# Altium PCB PCB1.PcbDoc (part 1 of 2)
Units mm, origin at the board's own origin, x right, y up, seen from the top; angles counter-clockwise.
Board outline 50.75 x 57.45 mm, 4 copper layers (Top Layer, GND, PWR, Bottom Layer), stack 1.591 mm thick; 64 components, 47 nets, 256 pads, 141 vias.
Unrouted connection lines stored in the file: 59.
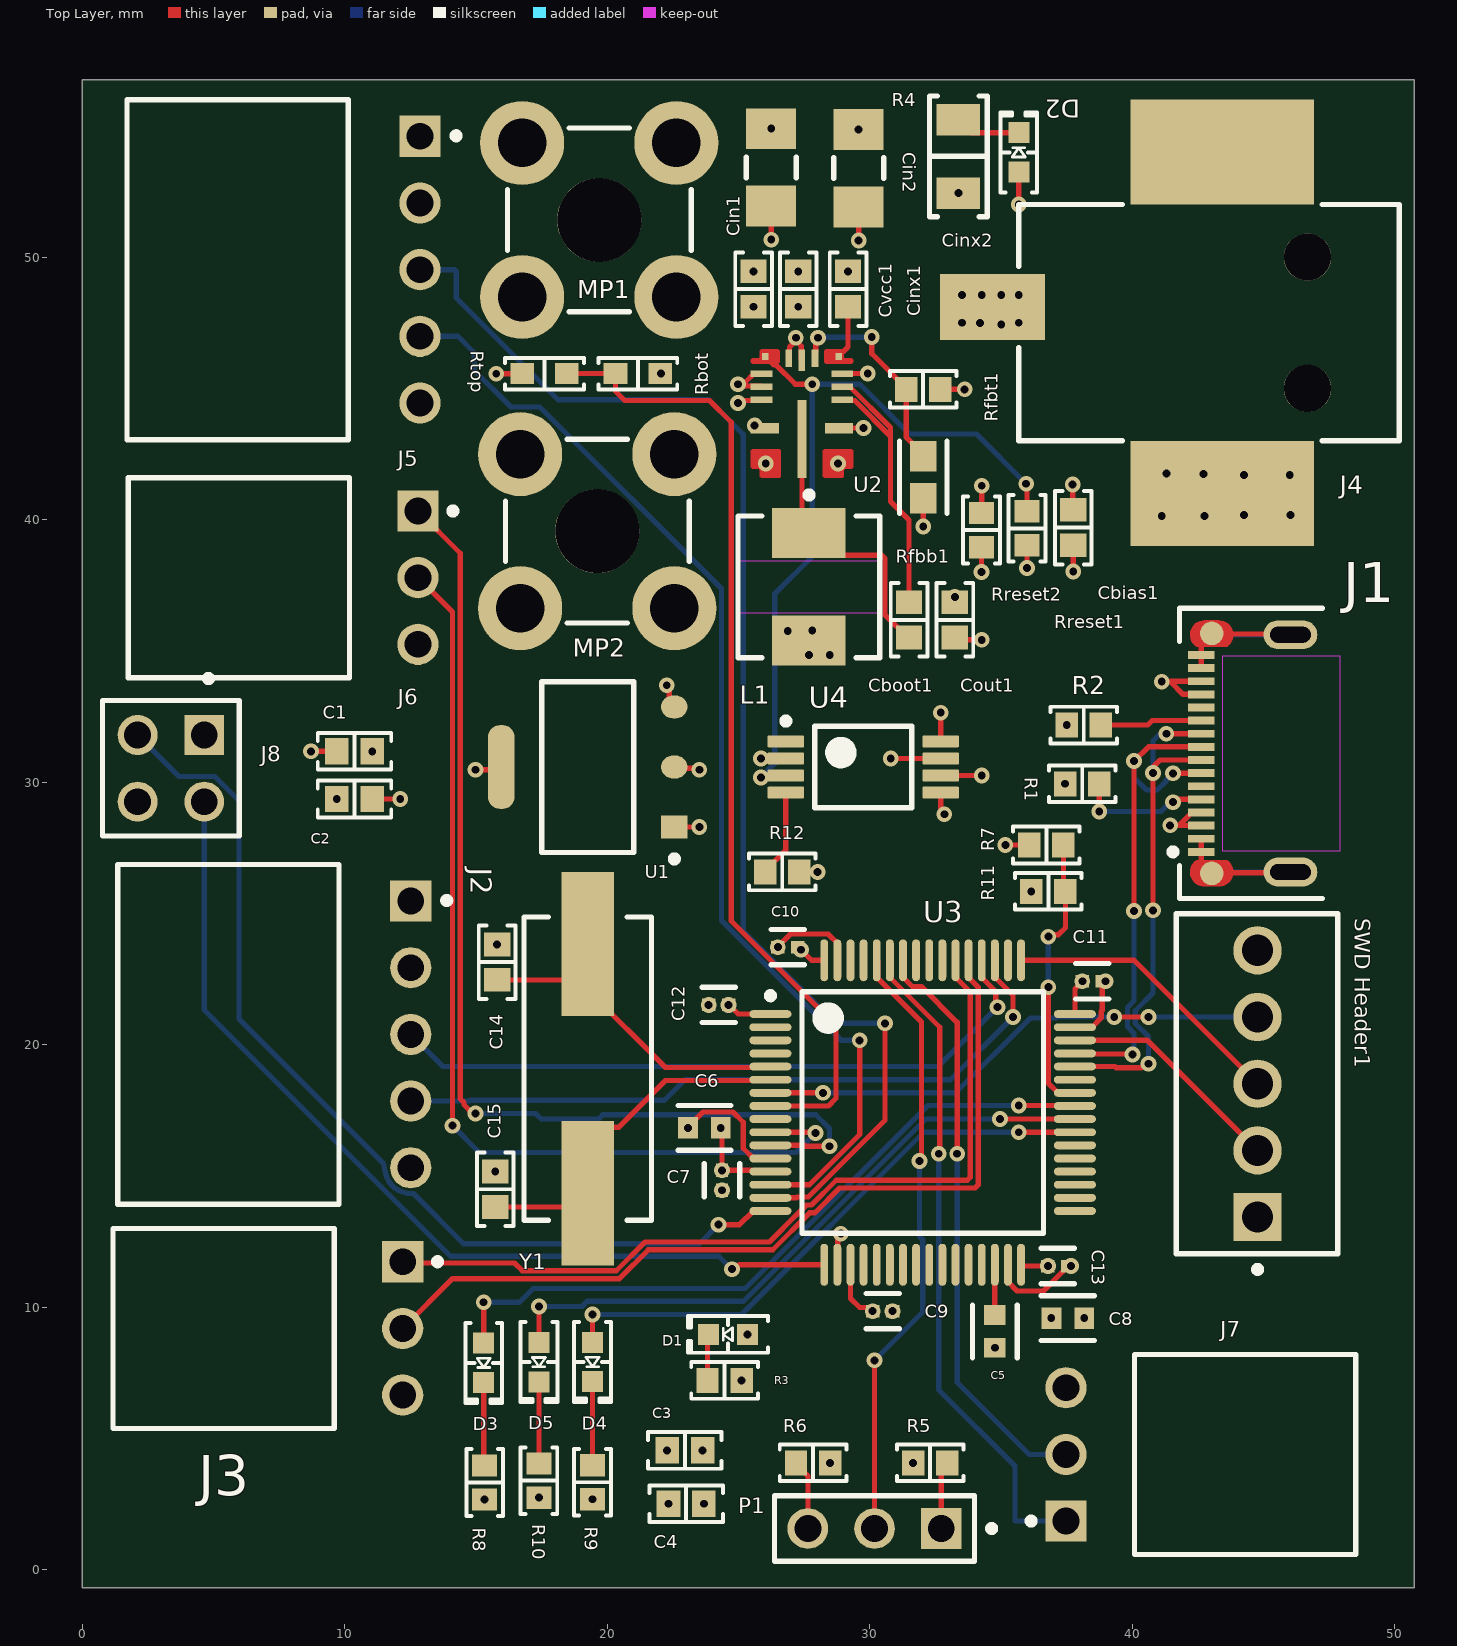
[diagram p0: Top Layer view]
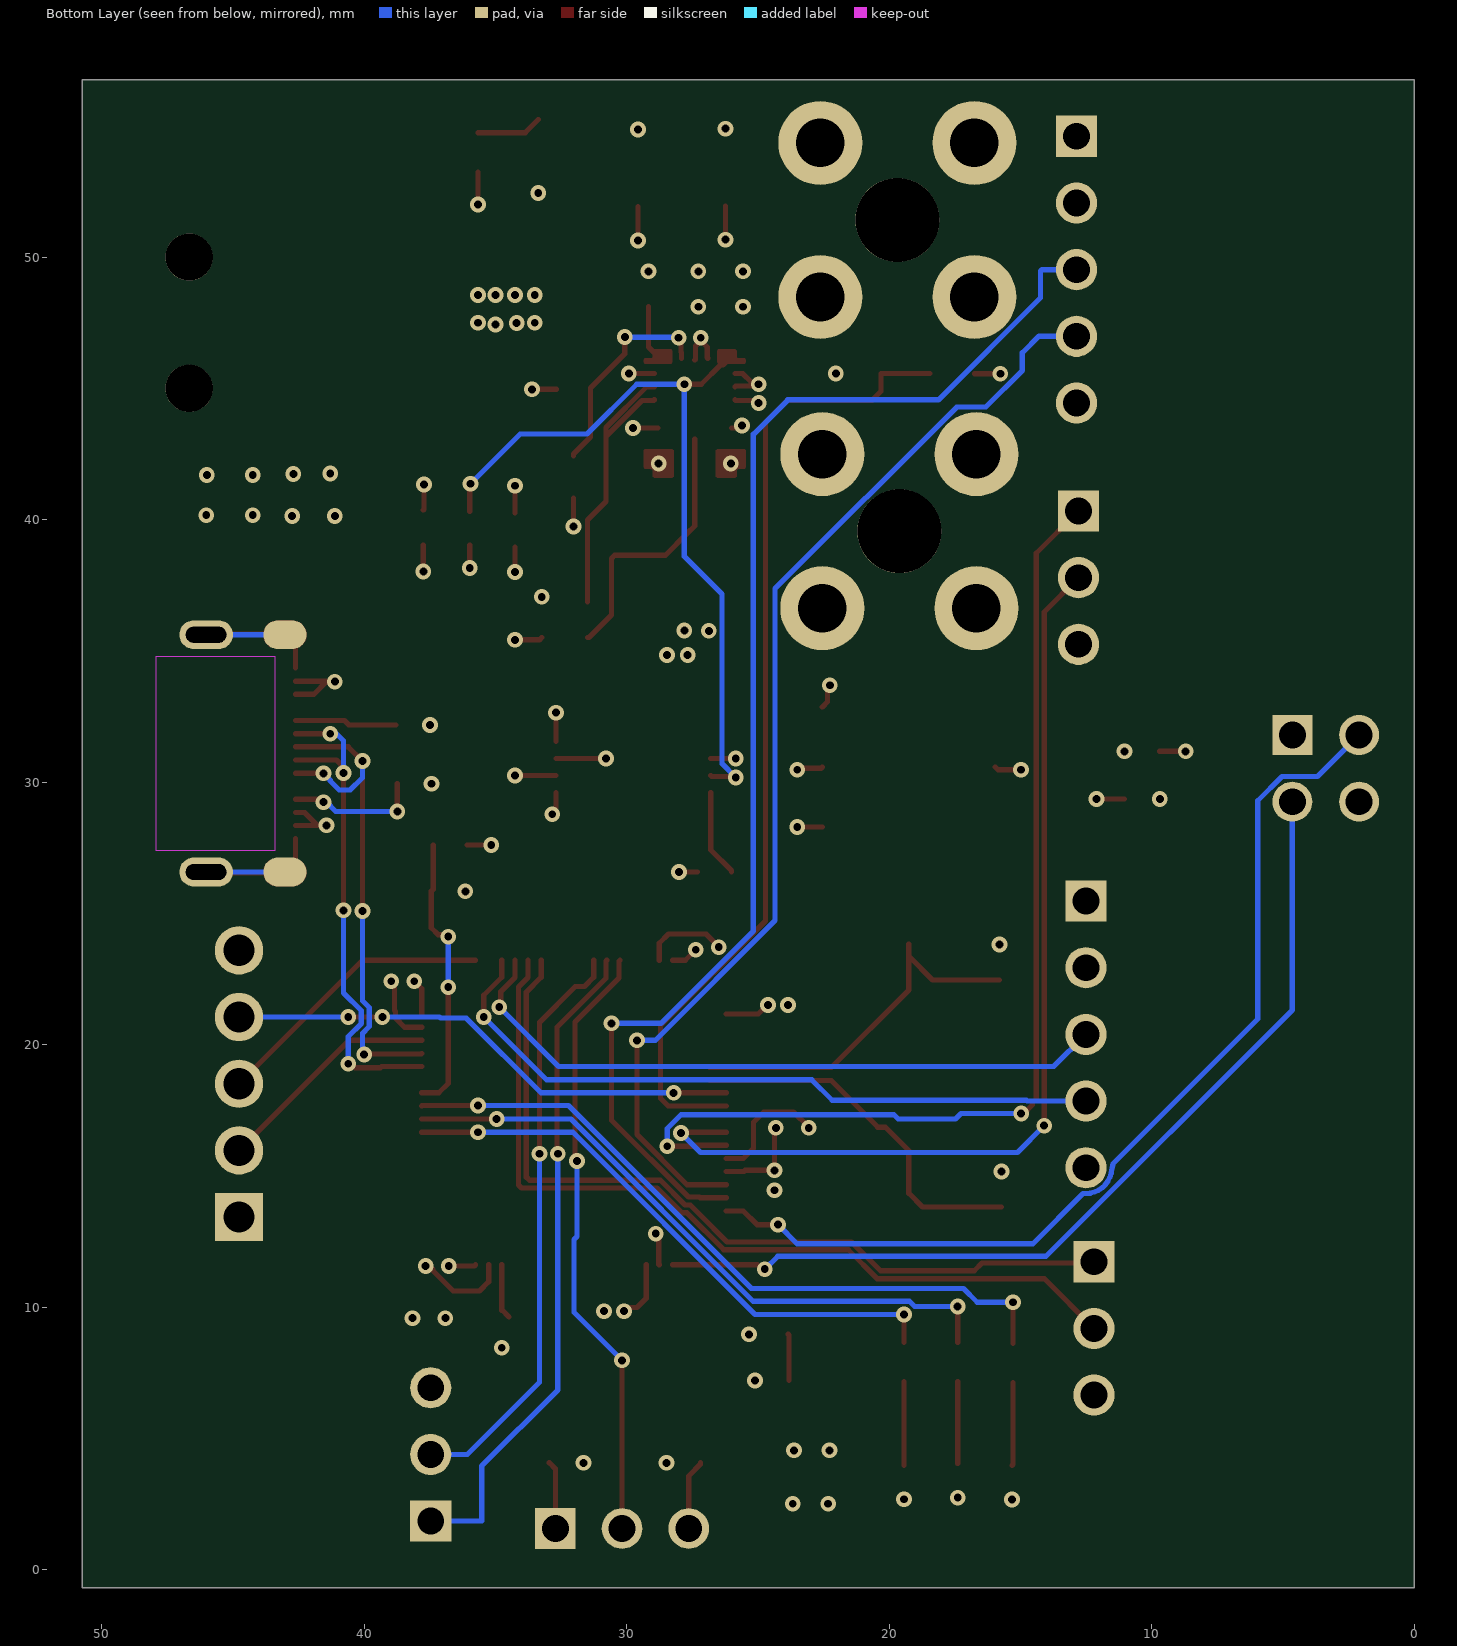
[diagram p1: Bottom Layer view, seen from below]
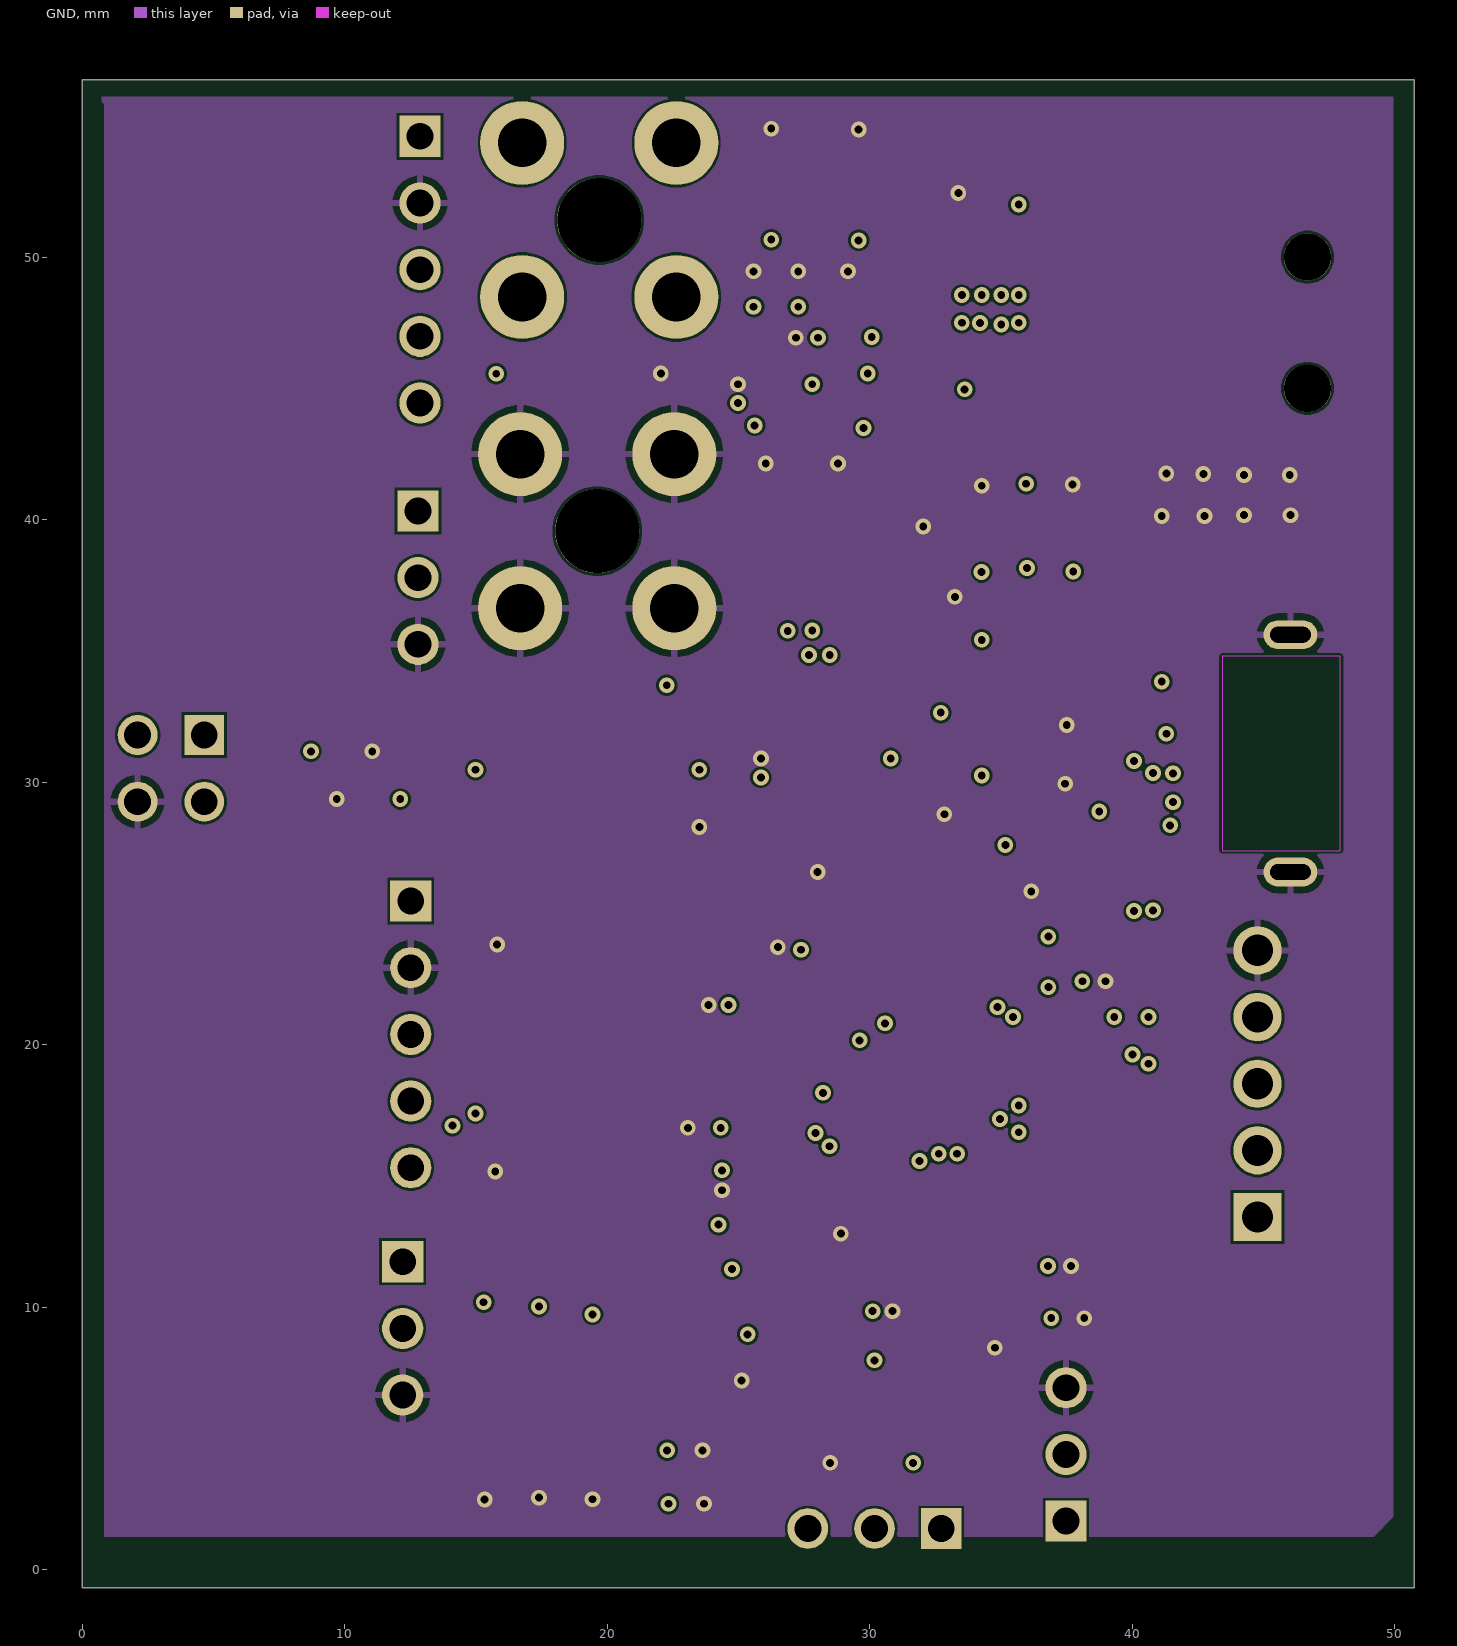
[diagram p2: GND]
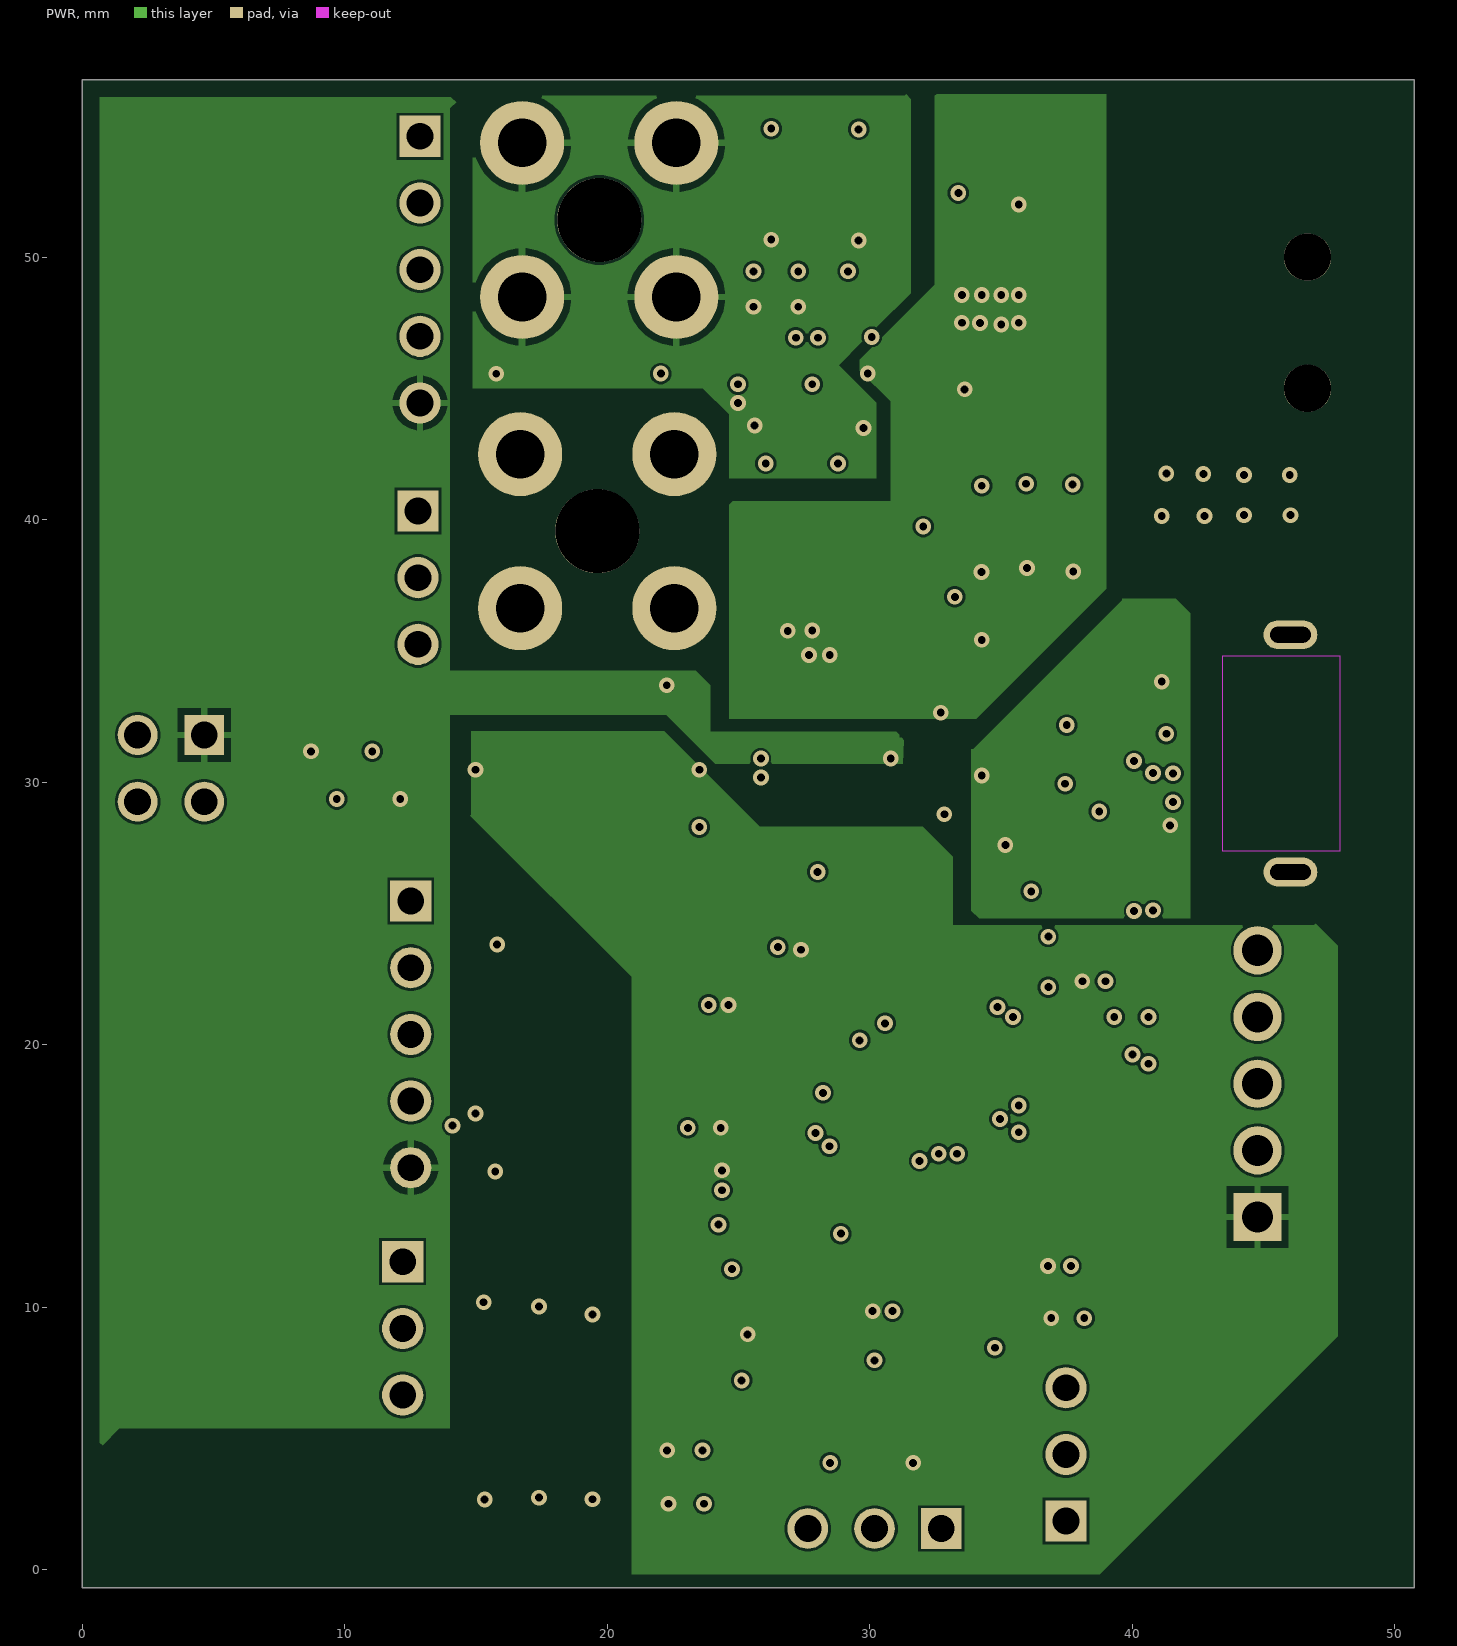
[diagram p3: PWR]
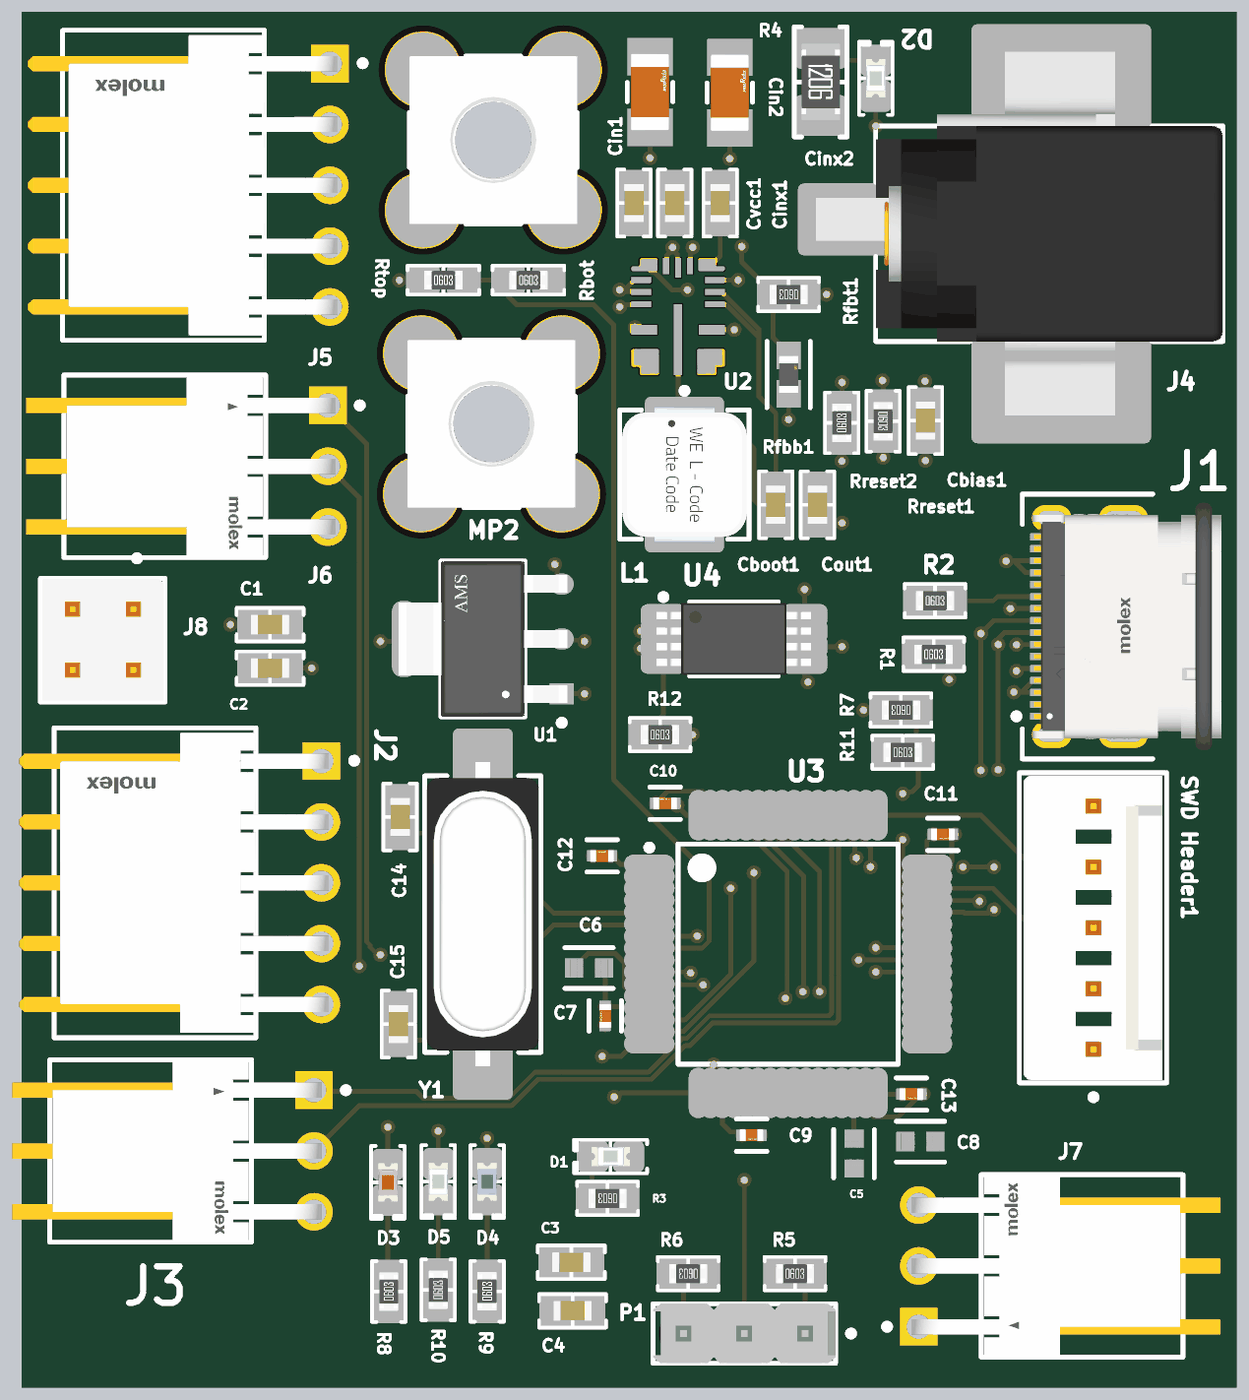
[diagram p4: 3D render of the assembled board from above, using the file's embedded part models]

## Layer stack, top to bottom
Top Solder: solder mask 0.0127, Solder Resist, Dk 3.3
Top Layer: signal copper 0.035
Dielectric 1: prepreg 0.2104, PP-006, Dk 4.1
GND: signal copper 0.0175
Dielectric1: core 1.065, FR-4, Dk 4.3
PWR: signal copper 0.0175
Dielectric 2: prepreg 0.2104, PP-006, Dk 4.1
Bottom Layer: signal copper 0.035
Bottom Solder: solder mask 0.0127, Solder Resist, Dk 3.3

## Board outline
0,-0.686 50.749,-0.686 50.749,56.769 0,56.769

## Design rules (kind name [scope] priority, off if disabled: settings)
Clearance [All] p1: gap=0.1 ignorepadtopadclearanceinfootprint=TRUE
DiffPairsRouting [All] p1: maxlimit=0.254 minlimit=0.254 mostfreqgap=0.254 toplayer_minwidth=0.254 toplayer_maxwidth=0.254 toplayer_prefwidth=0.254 midlayer1_minwidth=0.254 midlayer1_maxwidth=0.254 midlayer1_prefwidth=0.254 midlayer2_minwidth=0.254 midlayer2_maxwidth=0.254 midlayer2_prefwidth=0.254 bottomlayer_minwidth=0.254 bottomlayer_maxwidth=0.254 bottomlayer_prefwidth=0.254 maxuncoupledlength=12.7
HoleSize [All] p1: absolutevalues=TRUE maxlimit=7.62 minlimit=0.254 maxpercent=80.000 minpercent=20.000
MinimumAnnularRing [All] p1: minimumring=0.13
MinimumSolderMaskSliver [All] p1: minsoldermaskwidth=0.1
PasteMaskExpansion [All] p1: expansion=0.254
PlaneClearance [All] p1: clearance=0.381
PlaneConnect [All] p1: pad.planeconnectstyle=Relief pad.reliefexpansion=0.508 pad.reliefentries=4 pad.reliefconductorwidth=0.254 pad.reliefairgap=0.254 via.planeconnectstyle=Direct via.reliefexpansion=0.508 via.reliefentries=4 via.reliefconductorwidth=0.254 via.reliefairgap=0.254
PolygonConnect [All] p1: thpad.connectstyle=Relief thpad.reliefconductorwidth=0.254 thpad.reliefentries=4 thpad.polygonreliefangle="90 Angle" thpad.airgapwidth=0.254 smdpad.connectstyle=Relief smdpad.reliefconductorwidth=0.254 smdpad.reliefentries=4 smdpad.polygonreliefangle="90 Angle" smdpad.airgapwidth=0.254 via.connectstyle=Direct via.reliefconductorwidth=0.254 via.reliefentries=4 via.polygonreliefangle="90 Angle" via.airgapwidth=0.254
RoutingVias [All] p1: holewidth=0.15 width=0.25 viastyle="Through Hole" minholewidth=0.15 minwidth=0.25 maxholewidth=0.3 maxwidth=0.6
SMDNeckDown [All] p1: percent=100.000
SilkToSolderMaskClearance SilkscreenOverComponentPads [IsPad] p1: minsilkscreentomaskgap=0.1 clearancetoexposedcopper=TRUE
SolderMaskExpansion [All] p1: expansion=0.254 istentingtop=FALSE
SupplyNets "Schematic Supply Nets_2" [InNet('5V_SYS')] p1: voltage=0.000
SupplyNets "Schematic Supply Nets_3" [InNet('26V0')] p2: voltage=0.000
SupplyNets "Schematic Supply Nets_1" [InNet('3V3')] p3: voltage=0.000
SupplyNets "Schematic Supply Nets" [InNet('GND')] p4: voltage=0.000
Width [All] p1: maxlimit=0.5 minlimit=0.1 preferedwidth=0.2
23 further rules are at their usual default settings.

## Classes and differential pairs
component class TOP: J4 MP1 MP2
component class POWER: C1 C2 C3 C4 Cbias1 Cboot1 Cin1 Cin2 Cinx1 Cinx2 Cout1 Cvcc1 D1 D2 L1 R3 R4 R12 Rbot Rfbb1 Rfbt1 Rreset1 Rreset2 Rtop U1 U2 U4
component class USBC: J1 R1 R2
component class Designator: C5 C6 C7 C8 C9 C10 C11 C12 C13 C14 C15 D3 D4 D5 J2 J3 J5 J6 J7 J8 P1 R5 R6 R7 R8 R9 R10 R11 "SWD Header1" U3 Y1

## Components (designator, comment, footprint, x,y, rotation, side; value= is the part's Value field where it differs from the comment)
C1 "10 µF" "CAP 0603_1608" 10.371,31.179 r180 top
C2 "10 µF" "CAP 0603_1608" 10.371,29.362 r0 top
C3 "10 µF" "CAP 0603_1608" 22.957,4.549 r180 top
C4 "10 µF" "CAP 0603_1608" 23.008,2.517 r180 top
C5 "2u2" FP-CL10-IPC_C 34.766,9.085 r270 top
C6 "4u7" FP-CL10-IPC_C 23.699,16.835 r180 top
C7 "100n" FP-CL779-IPC_C 24.374,14.838 r270 top
C8 "4u7" FP-CL10-IPC_C 37.545,9.585 r0 top
C9 "100n" FP-CL779-IPC_C 30.49,9.853 r0 top
C10 "100n" FP-CL779-IPC_C 26.878,23.719 r180 top
C11 "100n" FP-CL779-IPC_C 38.479,22.419 r0 top
C12 "100n" FP-CL779-IPC_C 24.243,21.519 r180 top
C13 "100n" FP-CL779-IPC_C 37.166,11.569 r0 top
C14 "30 pF" "CAP 0603_1608" 15.805,23.146 r270 top
C15 "30 pF" "CAP 0603_1608" 15.733,14.496 r270 top
Cbias1 "0.1 µF" "CAP 0603_1608" 37.754,39.7 r90 top
Cboot1 "0.1 µF" "CAP 0603_1608" 31.5,36.189 r90 top
Cin1 "10uF" FP-GRT31C-0_2-IPC_A 26.246,53.424 r90 top
Cin2 "10uF" FP-GRT31C-0_2-IPC_A 29.578,53.397 r90 top
Cinx1 "1µF" "CAP 0603_1608" 25.576,48.788 r90 top
Cinx2 "1µF" "CAP 0603_1608" 27.279,48.788 r90 top
Cout1 "47 µF" "CAP 0603_1608" 33.243,36.189 r90 top
Cvcc1 "1µF" "CAP 0603_1608" 29.176,48.788 r90 top
D1 "Green" "LED 0603_1608 GREEN" 24.599,8.967 r180 top
D2 "Green" "LED 0603_1608 GREEN" 35.677,53.998 r90 top
D3 "Red" "LED 0603_1608 RED" 15.293,7.88 r270 top
D4 "Blue" "LED 0603_1608 BLUE" 19.441,7.914 r270 top
D5 "Green" "LED 0603_1608 GREEN" 17.399,7.911 r270 top
J1 "213083-0005" FP-2130830005-MFG 46.177,31.1 r90 top
J2 "22-12-2054" FP-22-12-2054-MFG 5.69,20.396 r90 top
J3 "22-12-2034" FP-22-12-2034-MFG 5.385,9.195 r90 top
J4 "694106105102" 694106105102 42.927,47.506 r90 top
J5 "22-12-2054" FP-22-12-2054-MFG 6.045,49.528 r90 top
J6 "22-12-2034" FP-22-12-2034-MFG 5.969,37.795 r90 top
J7 "22-12-2034" FP-22-12-2034-MFG 44.298,4.394 r270 top
J8 "HTSW-102-07-G-D" FP-HTSW-102-07-G-D-MFG 3.378,30.531 r180 top
L1 "744373340068" WE-LHMI_5020 27.686,37.446 r270 top
MP1 "74650073R" "WURTH 74650073" 19.696,51.421 r0 top
MP2 "74650073R" "WURTH 74650073" 19.62,39.565 r0 top
P1 "22-28-4033" MOLX-22-28-4033_V 30.184,1.571 r180 top
R1 "5.1 kOhms" "RES 0603_1608" 38.096,29.942 r0 top
R2 "5.1 kOhms" "RES 0603_1608" 38.154,32.177 r0 top
R3 "330 Ohms" "RES 0603_1608" 24.472,7.214 r180 top
R4 "500 Ohms" "RES 1206_3216" 33.375,53.848 r270 top
R5 "10 kOhms" "RES 0603_1608" 32.304,4.074 r0 top
R6 "10 kOhms" "RES 0603_1608" 27.841,4.074 r180 top
R7 "10 kOhms" "RES 0603_1608" 36.728,27.609 r180 top
R8 "330 Ohms" "RES 0603_1608" 15.33,3.324 r90 top
R9 "330 Ohms" "RES 0603_1608" 19.441,3.334 r90 top
R10 "330 Ohms" "RES 0603_1608" 17.397,3.396 r90 top
R11 "10 kOhms" "RES 0603_1608" 36.804,25.845 r0 top
R12 "750 Ohms" "RES 0603_1608" 26.667,26.586 r0 top
Rbot "33 kOhms" "YAGEO RES 0603_1608" 21.166,45.569 r0 top
Rfbb1 "24.9k" FP-TFCR0603-IPC_A 32.037,41.625 r270 top
Rfbt1 "100 kOhms" "RES 0603_1608" 32.037,44.969 r180 top
Rreset1 "100 kOhms" "RES 0603_1608" 35.989,39.675 r270 top
Rreset2 "100 kOhms" "RES 0603_1608" 34.26,39.609 r90 top
Rtop "300 kOhms" "YAGEO RES 0603_1608" 17.611,45.569 r0 top
"SWD Header1" "22-29-2051" FP-22-29-2051-MFG 44.755,18.517 r270 top
U1 "AMS1117-3.3" FP-AMS1117-IPC_C 19.26,30.582 r180 top
U2 "LM61480Q5RPHRQ1" RPH0016A 27.416,44.044 r180 top
U3 "STM32F446RCT6" STM-LQFP64_L 32.016,17.419 r0 top
U4 "TPS2115APWR" PW0008A_N 29.754,30.582 r0 top
Y1 "8MHz" "TXC 9C" 19.259,19.091 r270 top

## Footprints (in the part's own frame and the unit in brackets; to place one, negate y for a bottom-side part, rotate by r counter-clockwise, add the part's x,y. Pads: shape width x height; smd on the part's side, far side on the other; paste and mask are expansions set on the pad)
694106105102 [mm] "DC Power Jack Right Angled SMT ?6.4 with pegs"
  rect 2.5x4 smd: 1(0.6,8.25)
  rect 4x7 smd: 2(-6.5,-0.5) 3(6.5,-0.5)
  round 1.8 hole 1.8 unplated: MH1(-2.5,-3.75) MH2(2.5,-3.75)
  silkscreen extent -4.5,-7.25 4.5,7.25, body extent -7.6,-7.25 7.6,9.75, height 11.05
"CAP 0603_1608" [mm] "Chip Capacitor, 2-Leads, Body 1.60x0.80mm, IPC Medium Density"
  rect 0.9x1 smd: 1(-0.675,0) 2(0.675,0)
  silkscreen extent -1.4,-0.7 1.4,0.7, body extent -0.8,-0.41 0.8,0.41, height 0.82
FP-22-12-2034-MFG [mm]
  rect 1.57x1.57 hole 1.02 paste-2539.97 mask+0: 1(2.54,-6.823)
  round 1.57 hole 1.02 paste-2539.97 mask+0: 2(0,-6.823) 3(-2.54,-6.823)
  silkscreen extent -3.81,-8.27 3.81,4.22, body extent -3.91,-7.71 3.91,6.41, height 0.25
FP-22-12-2054-MFG [mm]
  rect 1.57x1.57 hole 1.02 paste-2539.97 mask+0: 1(5.08,-6.825)
  round 1.57 hole 1.02 paste-2539.97 mask+0: 2(2.54,-6.825) 3(0,-6.825) 4(-2.54,-6.825) 5(-5.08,-6.825)
  silkscreen extent -6.48,-8.32 6.48,4.34, body extent -6.58,-7.71 6.58,6.53, height 0.25
FP-22-29-2051-MFG [mm]
  rect 1.84x1.84 hole 1.19 paste-2539.97 mask+0: 1(5.08,0.02)
  round 1.84 hole 1.19 paste-2539.97 mask+0: 2(2.54,0.02) 3(0,0.02) 4(-2.54,0.02) 5(-5.08,0.02)
  silkscreen extent -6.48,-3.08 7.2,3.08, body extent -6.58,-3.18 6.58,3.18, height 0.25
FP-2130830005-MFG [mm]
  round 0.9 smd paste-1000 mask+0: 1(-4.57,3.15) 2(4.57,3.15)
  rrect100% 1.1x1.65 smd far side paste-1000 mask+0: 1(-4.52,3.15) 2(4.52,3.15)
  rrect100% 1.1x2.05 hole 1.55 slot 0.6 at 0 deg paste-2539.97 mask+0: 3(-4.52,0.15) 4(4.52,0.15)
  rect 0.3x1 smd paste+0 mask+0: A1(-3.75,3.55) A4(-2.75,3.55) A5(-1.75,3.55) A6(-0.75,3.55) A7(0.75,3.55) A8(1.75,3.55) A9(2.75,3.55) A12(3.75,3.55) B1(3.25,3.55) B4(2.25,3.55) B5(1.25,3.55) B6(0.25,3.55) B7(-0.25,3.55) B8(-1.25,3.55) B9(-2.25,3.55) B12(-3.25,3.55)
  Top Layer region: 5.07,3.425 5.001,3.691 4.812,3.891 4.549,3.974 4.28,3.919 4.07,3.741 4.07,3.741 4.07,2.559 4.28,2.381 4.549,2.326 4.812,2.409 5.001,2.609 5.07,2.875 5.07,2.875
  Top Layer region: -5.07,3.425 -5.001,3.691 -4.812,3.891 -4.549,3.974 -4.28,3.919 -4.07,3.741 -4.07,3.741 -4.07,2.559 -4.28,2.381 -4.549,2.326 -4.812,2.409 -5.001,2.609 -5.07,2.875 -5.07,2.875
  Keep-Out Layer region: -3.7,-1.745 3.7,-1.745 3.7,2.755 -3.7,2.755
  silkscreen extent -5.53,-1.07 5.53,4.75, body extent -5.33,-4.18 5.33,4.18, height 0.25
FP-AMS1117-IPC_C [mm]
  rect 1.004x0.872 smd paste+0 mask+0: 1(-3.295,2.29)
  rrect100% 1.004x0.872 smd paste+0 mask+0: 2(-3.295,0) 3(-3.295,-2.29)
  rrect87% 1.004x3.182 smd paste+0 mask+0: 4(3.295,0)
  silkscreen extent -3.42,-3.25 1.75,3.62, body extent -3.9,-3.35 3.9,3.35, height 0.25
FP-CL10-IPC_C [mm]
  rect 0.758x0.812 smd paste+0 mask+0: 1(-0.627,0) 2(0.627,0)
  silkscreen extent -1.01,-0.85 1.01,0.85, body extent -1.11,-0.55 1.11,0.55, height 0.25
FP-CL779-IPC_C [mm]
  rect 0.515x0.472 smd paste+0 mask+0: 1(-0.379,0) 2(0.379,0)
  silkscreen extent -0.64,-0.67 0.64,0.67, body extent -0.74,-0.38 0.74,0.38, height 0.25
FP-GRT31C-0_2-IPC_A [mm]
  rect 1.555x1.906 smd paste+0 mask+0: 1(-1.476,0) 2(1.476,0)
  silkscreen extent -0.4,-0.95 0.4,0.95, body extent -2.75,-1.45 2.75,1.45, height 0.25
FP-HTSW-102-07-G-D-MFG [mm]
  rect 1.52x1.52 hole 1.02 paste-2539.97 mask+0: 1(-1.27,-1.27)
  round 1.52 hole 1.02 paste-2539.97 mask+0: 2(-1.27,1.27) 3(1.27,-1.27) 4(1.27,1.27)
  silkscreen extent -2.6,-3.54 2.6,2.58, body extent -2.7,-2.68 2.7,2.68, height 0.25
FP-TFCR0603-IPC_A [mm]
  rect 1.158x1.012 smd paste+0 mask+0: 1(-0.802,0) 2(0.802,0)
  silkscreen extent -1.38,-0.91 1.38,0.91, body extent -1.88,-1.01 1.88,1.01, height 0.25
"LED 0603_1608 BLUE" [mm] "Chip Diode, 2-Leads, Body 1.60x0.80mm, IPC Medium Density"
  rect 0.8x0.8 smd: 1(-0.75,0) 2(0.75,0)
  silkscreen extent -1.52,-0.7 1.52,0.7, body extent -0.8,-0.4 0.8,0.4, height 0.53
"LED 0603_1608 GREEN" [mm] "Chip Diode, 2-Leads, Body 1.60x0.80mm, IPC Medium Density"
  rect 0.8x0.8 smd: 1(-0.75,0) 2(0.75,0)
  silkscreen extent -1.52,-0.7 1.52,0.7, body extent -0.8,-0.4 0.8,0.4, height 0.53
"LED 0603_1608 RED" [mm] "Chip Diode, 2-Leads, Body 1.60x0.80mm, IPC Medium Density"
  rect 0.8x0.8 smd: 1(-0.75,0) 2(0.75,0)
  silkscreen extent -1.52,-0.7 1.52,0.7, body extent -0.8,-0.4 0.8,0.4, height 0.53
MOLX-22-28-4033_V [mm] "THD, 3-Leads, Body 7.62x2.49mm, Pitch 2.54mm"
  rect 1.55x1.55 hole 1.02: 1(-2.54,0)
  round 1.55 hole 1.02: 2(0,0) 3(2.54,0)
  silkscreen extent -4.59,-1.24 3.81,1.24, body extent -3.81,-1.24 3.81,1.24, height 8.38
PW0008A_N [mm] "SOP, 8-Leads, Body 4.5x3.1mm, Pitch 0.65mm, IPC Medium Density"
  rrect22% 1.4x0.45 smd: 1(-2.95,0.975) 2(-2.95,0.325) 3(-2.95,-0.325) 4(-2.95,-0.975) 5(2.95,-0.975) 6(2.95,-0.325) 7(2.95,0.325) 8(2.95,0.975)
  silkscreen extent -3.07,-1.55 1.85,1.87, body extent -3.23,-1.5 3.23,1.5, height 1.2
"RES 0603_1608" [mm] "Chip Resistor, 2-Leads, Body 1.60x0.80mm, IPC Medium Density"
  rect 0.85x0.95 smd: 1(-0.65,0) 2(0.65,0)
  silkscreen extent -1.27,-0.7 1.27,0.7, body extent -0.8,-0.4 0.8,0.4, height 0.45
"RES 1206_3216" [mm] "Chip Resistor, 2-Leads, Body 3.13x1.55mm, IPC Medium Density"
  rect 1.2x1.65 smd: 1(-1.4,0) 2(1.4,0)
  silkscreen extent -2.3,-1.1 2.3,1.1, body extent -1.6,-0.8 1.6,0.8, height 0.6
RPH0016A [mm]
  rect 0.25x0.25 smd paste-0.112 mask+0.051: 1(-1.375,1.9) 6(-1.4,-2.175) 10(1.4,-2.175) 15(1.375,1.9)
  rect 1.075x0.4 smd paste+0 mask+0.051: 2(-1.413,0.55) 14(1.413,0.55)
  rect 0.825x0.25 smd paste+0 mask+0.051: 3(-1.538,-0.525) 4(-1.538,-1.025) 5(-1.538,-1.525) 11(1.538,-1.525) 12(1.538,-1.025) 13(1.538,-0.525)
  rect 0.25x0.675 smd paste+0 mask+0.051: 7(-0.5,-2.113) 9(0.5,-2.113)
  rect 0.25x0.825 smd paste+0 mask+0.051: 8(0,-2.038)
  rect 0.35x2.975 smd paste+0 mask+0.051: 16(0,0.963)
  Top Layer region: -1.9,1.35 -1.95,1.4 -1.95,2.05 -1.9,2.1 -1.65,2.1 -1.6,2.15 -1.6,2.4 -1.55,2.45 -0.85,2.45 -0.8,2.4 -0.8,1.4 -0.85,1.35
  Top Layer region: 1.9,1.35 1.95,1.4 1.95,2.05 1.9,2.1 1.65,2.1 1.6,2.15 1.6,2.4 1.55,2.45 0.85,2.45 0.8,2.4 0.8,1.4 0.85,1.35
  Top Layer region: 1.95,-1.95 1.95,-2.05 1.9,-2.1 1.65,-2.1 1.6,-2.15 1.6,-2.4 1.55,-2.45 0.9,-2.45 0.85,-2.4 0.85,-1.95 0.9,-1.9 1.9,-1.9
  Top Layer region: -1.95,-1.95 -1.95,-2.05 -1.9,-2.1 -1.65,-2.1 -1.6,-2.15 -1.6,-2.4 -1.55,-2.45 -0.9,-2.45 -0.85,-2.4 -0.85,-1.95 -0.9,-1.9 -1.9,-1.9
STM-LQFP64_L [mm] "QFP, 64-Leads, Body 10x10mm, Pitch 0.5mm, IPC High Density"
  oval 1.6x0.3 smd: 1(-5.8,3.75) 2(-5.8,3.25) 3(-5.8,2.75) 4(-5.8,2.25) 5(-5.8,1.75) 6(-5.8,1.25) 7(-5.8,0.75) 8(-5.8,0.25) 9(-5.8,-0.25) 10(-5.8,-0.75) 11(-5.8,-1.25) 12(-5.8,-1.75) 13(-5.8,-2.25) 14(-5.8,-2.75) 15(-5.8,-3.25) 16(-5.8,-3.75) 33(5.8,-3.75) 34(5.8,-3.25) 35(5.8,-2.75) 36(5.8,-2.25) 37(5.8,-1.75) 38(5.8,-1.25) 39(5.8,-0.75) 40(5.8,-0.25) 41(5.8,0.25) 42(5.8,0.75) 43(5.8,1.25) 44(5.8,1.75) 45(5.8,2.25) 46(5.8,2.75) 47(5.8,3.25) 48(5.8,3.75)
  oval 0.3x1.6 smd: 17(-3.75,-5.8) 18(-3.25,-5.8) 19(-2.75,-5.8) 20(-2.25,-5.8) 21(-1.75,-5.8) 22(-1.25,-5.8) 23(-0.75,-5.8) 24(-0.25,-5.8) 25(0.25,-5.8) 26(0.75,-5.8) 27(1.25,-5.8) 28(1.75,-5.8) 29(2.25,-5.8) 30(2.75,-5.8) 31(3.25,-5.8) 32(3.75,-5.8) 49(3.75,5.8) 50(3.25,5.8) 51(2.75,5.8) 52(2.25,5.8) 53(1.75,5.8) 54(1.25,5.8) 55(0.75,5.8) 56(0.25,5.8) 57(-0.25,5.8) 58(-0.75,5.8) 59(-1.25,5.8) 60(-1.75,5.8) 61(-2.25,5.8) 62(-2.75,5.8) 63(-3.25,5.8) 64(-3.75,5.8)
  silkscreen extent -5.92,-4.6 4.6,4.6, body extent -5,-5 5,5, height 1.6
"TXC 9C" [mm] "Crystal, 2-Leads, Body 4.70x11.40mm, Pitch 8.80mm, IPC Medium Density"
  rect 5.5x2 smd: 1(-4.75,0) 2(4.75,0)
  silkscreen extent -5.77,-2.43 5.77,2.43, body extent -6.35,-2.35 6.35,2.35, height 4.2
WE-LHMI_5020 [mm] "SMT Power Inductor, 2-Leads, body 5.2x5.2mm"
  rect 1.9x2.8 smd: 1(-2.05,0) 2(2.05,0)
  Top Layer keep-out region: -1,2.7 1,2.7 1,-2.7 -1,-2.7
  silkscreen extent -3.62,-2.7 2.7,2.7, body extent -2.85,-2.6 2.85,2.6, height 1.8
"WURTH 74650073" [mm] "REDCUBE THR with internal thread, M3x2.5mm, through"
  round 3.2 hole 1.85: 1(-2.935,-2.935) 1(-2.935,2.935) 1(2.935,-2.935) 1(2.935,2.935)
  round 3.2 hole 3.2 unplated: MH1(0,0)
  silkscreen extent -3.5,-3.5 3.5,3.5, body extent -3.5,-3.5 3.5,3.5, height 3
"YAGEO RES 0603_1608" [mm] "Chip Resistor, 2-Leads, Body 1.60x0.80mm"
  rect 0.9x0.8 smd: 1(-0.85,0) 2(0.85,0)
  silkscreen extent -1.5,-0.6 1.5,0.6, body extent -0.8,-0.4 0.8,0.4, height 0.45

## Part data
C1 C2 C3 C4: library part CM105X5R106K16AT, "0603 X5R 10UF10% 16V", Device Package="0603 (1608 Metric)", manufacturer="KYOCERA AVX", Operating Temperature="-55°C ~ 85°C", Supplier Part Number 1=478-CM105X5R106K16ATCT-ND, Temperature Coefficient=X5R, Tolerance=±10%, Voltage - Rated=16V, Applications="General Purpose", Capacitance="10 µF", componentlink1description=Datasheet, componentlink1url=https://ele.kyocera.com/assets/products/capacitor/CM_Series_e.pdf, componentlink2description="DigiKey Link", componentlink2url=https://www.digikey.com/en/products/detail/kyocera-avx/CM105X5R106K16AT/17866311, lastupdated="2/9/2024 8:08:53 PM", Lifecycle Status=Active, Minimum Order=1, Mounting Type="Surface Mount, MLCC", Package / Case="0603 (1608 Metric)", packaging=TapeAndReel, Part Number=CM105X5R106K16AT, Part Status=Active, partid=55416, price=0.03, series=CM, Size / Dimension="0.063\" L x 0.031\" W (1.60mm x 0.80mm)", Supplier 1=DigiKey, Thickness (Max)="0.039\" (1.00mm)"
C5 C6 C8: library part CMP-13271-003017-1, "Cap Ceramic 4.7uF 10V X5R ±10% Pad SMD 0603 +85°C T/R", Capacitance=4.7uF, Case Code (Imperial)=0603, Case Code (Metric)=1608, Dielectric=X5R, Max Operating Temperature=85°C, Min Operating Temperature=-55°C, Package Quantity=1, Tolerance=10%, Voltage Rating=10V, Case/Package=0603, Contact Plating=Tin, Depth=0.8mm, Height=0.8mm, Length=1.6mm, Mount="Surface Mount", packaging="Tape and Reel", Radiation Hardening=No, Thickness=0.035inch, Width=0.031inch
C7 C9 C10 C11 C12 C13: library part CMP-13271-002336-1, "Cap Ceramic 100nF 50V X7R ±10% SMD 0402 +125°C Paper T/R"
C14 C15: library part 0603N300J500CT, "CAP CER 30PF 50V C0G/NP0 0603", Device Package="0603 (1608 Metric)", manufacturer="Walsin Technology Corporation", Operating Temperature="-55°C ~ 125°C", Supplier Part Number 1=1292-1515-1-ND, Temperature Coefficient="C0G, NP0", Tolerance=±5%, Voltage - Rated=50V, Applications="General Purpose", Capacitance="30 pF", componentlink1description=Datasheet, componentlink1url=http://www.passivecomponent.com/wp-content/uploads/2018/10/MLCC.pdf, componentlink2description="DigiKey Link", componentlink2url=https://www.digikey.com/en/products/detail/walsin-technology-corporation/0603N300J500CT/9355012, lastupdated="2/9/2024 8:10:20 PM", Lifecycle Status=Active, Minimum Order=1, Mounting Type="Surface Mount, MLCC", Package / Case="0603 (1608 Metric)", packaging=TapeAndReel, Part Number=0603N300J500CT, Part Status=Active, partid=9974, price=0.01, series=-, Size / Dimension="0.063\" L x 0.031\" W (1.60mm x 0.80mm)", Supplier 1=DigiKey, Thickness (Max)="0.034\" (0.87mm)"
Cbias1 Cboot1: library part C0603C104K5RAC7411, "CAP CER 0.1UF 50V X7R 0603", Device Package="0603 (1608 Metric)", manufacturer=KEMET, Operating Temperature="-55°C ~ 125°C", Supplier Part Number 1=399-C0603C104K5RAC7411CT-ND, Temperature Coefficient=X7R, Tolerance=±10%, Voltage - Rated=50V, Applications="Bypass, Decoupling", Capacitance="0.1 µF", componentlink1description=Datasheet, componentlink1url=https://api.kemet.com/component-edge/download/datasheet/C0603C104K5RAC7411.pdf, componentlink2description="DigiKey Link", componentlink2url=https://www.digikey.com/en/products/detail/kemet/C0603C104K5RAC7411/3317013, lastupdated="2024-02-09 8:10:30 PM", Lifecycle Status=Active, Minimum Order=1, Mounting Type="Surface Mount, MLCC", Package / Case="0603 (1608 Metric)", packaging=TapeAndReel, Part Number=C0603C104K5RAC7411, Part Status=Active, partid=2233, price=0.01, series="SMD Comm X7R", Size / Dimension="0.063\" L x 0.031\" W (1.60mm x 0.80mm)", Supplier 1=DigiKey, Thickness (Max)="0.035\" (0.90mm)"
Cin1 Cin2: library part CMP-06035-048951-1, "CAP CER 10UF 50V X5R 1206", Case Code (Imperial)=1206, Case Code (Metric)=3216, Max Operating Temperature=85°C, Min Operating Temperature=-55°C, Ratings=AEC-Q200, Tolerance=20%, Voltage Rating=50V, Capacitance=10uF, Case/Package=1206, Length=0.126inch, Mount="Surface Mount", packaging="Tape and Reel", Thickness=0.071inch, Width=0.063inch
Cinx1 Cinx2 Cvcc1: library part 06035D105MAT2A, "CAP CER 1UF 50V X5R 0603", Device Package="0603 (1608 Metric)", manufacturer="AVX Corporation", Operating Temperature="-55°C ~ 85°C", Supplier Part Number 1=478-11443-1-ND, Temperature Coefficient=X5R, Tolerance=±20%, Voltage - Rated=50V, Applications="General Purpose", Capacitance=1µF, componentlink1description=Datasheet, componentlink1url=http://datasheets.avx.com/cx5r.pdf, componentlink2description="DigiKey Link", componentlink2url=http://digikey.com/product-detail/en/avx-corporation/06035D105MAT2A/478-11443-1-ND/8019298, lastupdated="2020-09-02 1:03:34 AM", Lifecycle Status=Active, Minimum Order=1, Mounting Type="Surface Mount, MLCC", Package / Case="0603 (1608 Metric)", packaging=TapeAndReel, Part Number=06035D105MAT2A, Part Status=Active, partid=3200, price=0.05, series=-, Size / Dimension="0.063\" L x 0.032\" W (1.60mm x 0.81mm)", Supplier 1=DigiKey, Thickness (Max)="0.035\" (0.90mm)"
Cout1: library part CL10A476MQ8QRNC, "CAP CER 47UF 6.3V X5R 0603", Device Package="0603 (1608 Metric)", manufacturer="Samsung Electro-Mechanics", Operating Temperature="-55°C ~ 85°C", Supplier Part Number 1=1276-CL10A476MQ8QRNCCT-ND, Temperature Coefficient=X5R, Tolerance=±20%, Voltage - Rated=6.3V, Applications="General Purpose", Capacitance="47 µF", componentlink1description=Datasheet, componentlink1url=https://media.digikey.com/pdf/Data%20Sheets/Samsung%20PDFs/CL10A476MQ8QRNC_Spec.pdf, componentlink2description="DigiKey Link", componentlink2url=https://www.digikey.com/en/products/detail/samsung-electro-mechanics/CL10A476MQ8QRNC/10478988, lastupdated="2024-02-09 8:09:49 PM", Lifecycle Status=Active, Minimum Order=1, Mounting Type="Surface Mount, MLCC", Package / Case="0603 (1608 Metric)", packaging=TapeAndReel, Part Number=CL10A476MQ8QRNC, Part Status=Active, partid=45940, price=0.29, series=CL, Size / Dimension="0.063\" L x 0.031\" W (1.60mm x 0.80mm)", Supplier 1=DigiKey, Thickness (Max)="0.039\" (1.00mm)"
D1 D2: library part 150060GS75003, "LED GREEN CLEAR 0603 SMD", Current - Test=20mA, Device Package="0603 (1608 Metric)", Lens Color=Colorless, manufacturer="Würth Elektronik", Millicandela Rating=1600mcd, Supplier Device Package=0603, Supplier Part Number 1=732-150060GS75003CT-ND, Voltage - Forward (Vf) (Typ)=3.2V, Color=Green, componentlink1description=Datasheet, componentlink1url=https://www.we-online.com/catalog/datasheet/150060GS75003.pdf, componentlink2description="DigiKey Link", componentlink2url=https://www.digikey.com/en/products/detail/würth-elektronik/150060GS75003/16022170, Height (Max)=0.80mm, lastupdated="6/3/2024 7:58:49 PM", Lens Size="1.10mm x 0.80mm", Lens Style="Rectangle with Flat Top", Lens Transparency=Clear, Lifecycle Status=Active, Minimum Order=1, Mounting Type="Surface Mount", Package / Case="0603 (1608 Metric)", packaging=TapeAndReel, Part Number=150060GS75003, Part Status=Active, partid=1111, price=0.18, series=WL-SMCW, Size / Dimension="1.60mm L x 0.80mm W", Supplier 1=DigiKey, Viewing Angle=140°, Wavelength - Dominant=525nm, Wavelength - Peak=515nm
D3: library part 19-213SDRC/S259/TR8, "LED RED CLEAR 2SMD", Current - Test=10mA, Device Package="0603 (1608 Metric)", Lens Color=Colorless, manufacturer="Everlight Electronics Co Ltd", Supplier Device Package=2-SMD, Supplier Part Number 1=1080-1580-1-ND, Voltage - Forward (Vf) (Typ)=2V, Color=Red, componentlink1description=Datasheet, componentlink1url=//media.digikey.com/pdf/Data%20Sheets/Everlight%20PDFs/19-213SDRC-S259-TR8.pdf, componentlink2description="DigiKey Link", componentlink2url=http://digikey.com/product-detail/en/everlight-electronics-co-ltd/19-213SDRC-S259-TR8/1080-1580-1-ND/8535303, Configuration=Standard, Height (Max)=0.70mm, lastupdated="6/3/2024 7:59:48 PM", Lens Size="1.20mm x 0.80mm", Lens Style="Rectangle with Flat Top", Lens Transparency=Clear, Lifecycle Status=Active, Minimum Order=1, Mounting Type="Surface Mount", Package / Case="0603 (1608 Metric)", packaging=TapeAndReel, Part Number=19-213SDRC/S259/TR8, Part Status=Active, partid=372, price=0.06, series=-, Size / Dimension="1.60mm L x 0.80mm W", Supplier 1=DigiKey, Viewing Angle=120°, Wavelength - Peak=650nm
D4: library part 19-213SUBC/S400-A5/S208-2/TR8, "LED BLUE CLEAR 2SMD", Current - Test=5mA, Device Package="0603 (1608 Metric)", Lens Color=Colorless, manufacturer="Everlight Electronics Co Ltd", Supplier Device Package=2-SMD, Supplier Part Number 1=1080-1581-1-ND, Voltage - Forward (Vf) (Typ)=2.9V, Color=Blue, componentlink1description=Datasheet, componentlink1url=//media.digikey.com/pdf/Data%20Sheets/Everlight%20PDFs/19-213SUBC-S400-A5-S208-2-TR8.pdf, componentlink2description="DigiKey Link", componentlink2url=https://www.digikey.com/en/products/detail/everlight-electronics-co-ltd/19-213SUBC-S400-A5-S208-2-TR8/8535275, Configuration=Standard, Height (Max)=0.70mm, lastupdated="6/3/2024 7:57:52 PM", Lens Size="1.20mm x 0.80mm", Lens Style="Rectangle with Flat Top", Lens Transparency=Clear, Lifecycle Status=Active, Minimum Order=1, Mounting Type="Surface Mount", Package / Case="0603 (1608 Metric)", packaging=TapeAndReel, Part Number=19-213SUBC/S400-A5/S208-2/TR8, Part Status=Active, partid=808, price=0.05, series=-, Size / Dimension="1.60mm L x 0.80mm W", Supplier 1=DigiKey, Viewing Angle=120°, Wavelength - Peak=468nm
D5: library part 150060GS55040, "LED GREEN DIFFUSED 0603 SMD", Current - Test=20mA, Device Package="0603 (1608 Metric)", Lens Color=0.50mm, manufacturer="Würth Elektronik", Millicandela Rating=430mcd, Supplier Part Number 1=732-12014-1-ND, Voltage - Forward (Vf) (Typ)=3.2V, Color=Green, componentlink1description=Datasheet, componentlink1url=https://www.we-online.de/web/en/index.php/download/media/07_electronic_components/download_center_1/application_notes_berichte/ano002_leds___the_future_of_horticultural_lighting/ANO002b_EN_LEDs_The_Future_of_Horticultural_Lighting.pdf, componentlink2description="DigiKey Link", componentlink2url=https://www.digikey.com/en/products/detail/würth-elektronik/150060GS55040/8557179, Configuration=Standard, Height (Max)=0.50mm, lastupdated="6/3/2024 7:58:52 PM", Lens Size="1.00mm x 0.80mm", Lens Style="Rectangle with Flat Top", Lens Transparency=Diffused, Lifecycle Status=Active, Minimum Order=1, Mounting Type="Surface Mount", Package / Case="0603 (1608 Metric)", packaging=TapeAndReel, Part Number=150060GS55040, Part Status=Active, partid=673, price=0.14, series=WL-SMCD, Size / Dimension="1.60mm L x 0.80mm W", Supplier 1=DigiKey, Supplier Device Package="0603 (1608 Metric)", Viewing Angle=140°, Wavelength - Dominant=525nm, Wavelength - Peak=520nm
J1: library part CMP-04767-000030-2, "CONN RCP USB2.0 TYP C 24P SMD RA", Current Rating=5A, Max Operating Temperature=85°C, Min Operating Temperature=-40°C, Voltage Rating=30V, Contact Material="Gold, Nickel", Country of Origin=CN, Gender=Receptacle, NexarPartId=114105384, Number of Contacts=16, Schedule B="8536695050, 8536695050", USB Standard="USB 2.0"
J2 J5: library part CMP-00257-00024825-1, "22-12-2054 KK® 254 Solid Header, Right Angle, with Friction Lock, 5 Circuits, 0.51µm Gold (Au) Plating", Color=White, Contact Resistance=10mΩ, Current Rating=4A, Flammability Rating="UL94 V-0", Insulation Resistance=50GΩ, Max Operating Temperature=75°C, Min Operating Temperature=0°C, Voltage Rating=250V, Approvals="CSA, UL", Contact Material=Brass, Contact Plating=Gold, Gender=Male, Glow Wire Compliant=Non-compliant, Halogen Free="Low Halogen", Housing Color=White, Housing Material=Nylon, Lead Free="Contains Lead", Lead Pitch=2.54mm, Mount="Through Hole", NexarPartId=24825, Number of Circuits=5, Number of Contacts=5, Number of Positions=5, Number of Rows=1, Orientation="Right Angle", packaging=Bulk, Pitch=2.54mm, Radiation Hardening=No, REACH SVHC=Unknown, RoHS=Compliant, Schedule B=8536694040, Termination="Through Hole", Voltage Rating (DC)=250V
J3 J6 J7: library part CMP-04776-000587-1, "CONN HEADER R/A 3POS 2.54MM", Color=White, Contact Resistance=10mR, Current Rating=4A, Flammability Rating="UL94 V-0", Max Current Rating=3A, Max Operating Temperature=75°C, Max Voltage Rating (AC)=250V, Min Operating Temperature=0°C, Approvals=UL, Connector Type="Male Pin", Contact Material=Brass, Contact Mating Length=0.264inch, Contact Plating=Gold, Contact Type="Male Pin", Depth=12.83mm, Fastening Type=Friction, Gender=Male, Height=2.03mm, Housing Color=White, Housing Material=Nylon, Length=7.62mm, Mount="Through Hole", Number of Circuits=3, Number of Contacts=3, Number of Positions=3, Number of Rows=1, Orientation="Right Angle", packaging=Bulk, Pitch=2.54mm, Radiation Hardening=No, RoHS Compliant=Yes, series="KK® 7478", Termination=Solder, Voltage Rating=250V
J4: library part CMP-1502-00176-3, "DC Power Jack Connector with Pegs WR-DC, Male, Right Angled, SMT, 5 A, 24 V", Color=Black, Current Rating=5A, Flammability Rating="UL94 V-0", Insulation Resistance=100MΩ, Max Operating Temperature=85°C, Min Operating Temperature=-40°C, Operating Supply Voltage=24V, Connector Type=Power, Contact Gender=Female, Contact Material=Gold, Contact Plating=Tin, Gender=Male, Height=11.2mm, Housing Material=Polyamide, Mount="Surface Mount", Number of Contacts=3, packaging="Tape and Reel", REACH SVHC=Unknown, RoHS=Compliant, Shielding=Unshielded, Termination=SMD/SMT, Voltage Rating=24V, Voltage Rating (DC)=24V
J8: library part CMP-02766-000010-1, "CONN HEADER VERT 4POS 2.54MM", Current Rating=6.3A, manufacturer=Samtec, Temperature="-55°C to +125°C", Temperature Range High=+125°C, Temperature Range Low=-55°C, Voltage Rating=550V, Automotive=No, Category=Conn, componentlink2description=Datasheet, componentlink2url=http://suddendocs.samtec.com/catalog_english/htsw_th.pdf, Conn Gender=Male, Conn Orientation=Straight, Contact Material=Gold,Nickel, Device Class L1=Connectors, Device Class L2="Headers and Wire Housings", Device Class L3=unset, Digikey Description="CONN HEADER VERT 4POS 2.54MM", Height=8.71mm, Lead Free=Yes, Manufacturer Part Number=HTSW-102-07-G-D, Mouser Description="Conn Unshrouded Header HDR 4 POS 2.54mm Solder ST Thru-Hole Bag", Number of Contacts=4, Number of Rows=2, Octopart=https://octopart.com/htsw-102-07-g-d-samtec-10531767, Package=HTSW-102-07-G-D, Pitch=2.54mm, RoHS=TRUE
L1: library part CMP-03913-52738382-5, "We-lhmi Series, Shielded Wire-wound SMD Inductor 680 Nh +/-20% Wire-wound 6.8A I", Ambient Temperature Range High=85°C, Ambient Temperature Range Low=-40°C, Case/Package=SMD/SMT, Current Rating=6.8A, DC Resistance (DCR)=11mΩ, Inductance=680nH, Inductance Tolerance=20%, Max Operating Temperature=125°C, Saturation Current=9.8A, Self Resonant Frequency=90MHz, Test Frequency=100kHz, Composition=Wirewound, Core Material=Ferrite, Height=1.8mm, Height - Seated (Max)=1.9812mm, Length=5.7mm, Max DC Current=6.8A, Min Operating Temperature=-40°C, Mount="Surface Mount", Number of Pins=2, REACH SVHC=Unknown, RMS Current (Irms)=6.8A, RoHS=Compliant, Shielding=Shielded, Termination=SMD/SMT, Tolerance=20%, Width=5.2mm
MP1 MP2: "TERM REDCUBE M3 4PIN PCB", Current Rating (Amps)="50 A", manufacturer="Würth Elektronik", Supplier Part Number 1=732-10882-1-ND, componentlink1description=Datasheet, componentlink1url=https://katalog.we-online.de/em/datasheet/74650073R.pdf, componentlink2description="DigiKey Link", componentlink2url=https://www.digikey.com/en/products/detail/würth-elektronik/74650073R/6643978, Features="Screw not Included", lastupdated="8/7/2022 8:38:54 PM", Lifecycle Status=Active, Minimum Order=1, Mounting Type="Through Hole", Number of Pins=4, packaging=TapeAndReel, Part Number=74650073R, Part Status=Active, price=2.28, Screw Size=M3, series="REDCUBE WP-THRBU", Supplier 1=DigiKey, Terminal Type="Screw Terminal, Power Tap", Termination=Solder
P1: library part CMP-1676-00001-5, "Male Header, Pitch 2.54 mm, 1 x 3 Position, Height 8.38 mm, Tail Length 3.18 mm, RoHS, Bulk", Colour=Black, Current Rating="4 A", manufacturer=Molex, Max Operating Temperature="75 degC", Min Operating Temperature="0 degC", Package Quantity=1, Voltage Rating="250 V", componentlink1description="Manufacturer URL", componentlink1url=http://www.molex.com/, componentlink2description=Datasheet, componentlink2url=http://www.molex.com/pdm_docs/sd/022284033_sd.pdf, Contact Finish=Gold, Contact Material=Brass, Contact Plating=Gold, DatasheetVersion="Rev. G, 01/2012", Height="8.38 mm", Lead Pitch="0.1 inch", Length="7.62 mm", Mount="Through Hole", Mounting Technology="Through Hole", PackageDescription="Male Header, Pitch 2.54 mm, 1 x 3 Position, Height 8.38 mm, Tail Length 3.18 mm", PackageReference=22-28-4033, packaging=Bulk, Pins=3, REACH SVHC=Unknown, RoHSCompliant=true, Rows=1
R1 R2: library part TNPW06035K10BYEN, "RES 5.1K OHM 0.1% 1/10W 0603", Device Package="0603 (1608 Metric)", manufacturer="Vishay Dale", Operating Temperature="-55°C ~ 155°C", Power (Watts)="0.125W, 1/8W", Ratings=AEC-Q200, Supplier Device Package=0603, Supplier Part Number 1=541-9831-1-ND, Temperature Coefficient=±10ppm/°C, Tolerance=±0.1%, componentlink1description=Datasheet, componentlink1url=http://www.vishay.com/docs/28758/tnpw_e3.pdf, componentlink2description="DigiKey Link", componentlink2url=http://digikey.com/product-detail/en/vishay-dale/TNPW06035K10BYEN/541-9831-1-ND/9562456, Composition="Thin Film", Features="Anti-Sulfur, Automotive AEC-Q200, Moisture Resistant", Height - Seated (Max)="0.022\" (0.55mm)", lastupdated="2/9/2024 8:43:35 PM", Lifecycle Status=Active, Minimum Order=1, Number of Terminations=2, Package / Case="0603 (1608 Metric)", packaging=TapeAndReel, Part Number=TNPW06035K10BYEN, Part Status=Active, partid=5273, price=0.27, Resistance="5.1 kOhms", series="TNPW e3", Size / Dimension="0.061\" L x 0.033\" W (1.55mm x 0.85mm)", Supplier 1=DigiKey
R3: library part ERA-3VEB3300V, "RES 330 OHM 0.1% 1/8W 0603", Device Package="0603 (1608 Metric)", manufacturer="Panasonic Electronic Components", Operating Temperature="-55°C ~ 155°C", Power (Watts)="0.125W, 1/8W", Ratings=AEC-Q200, Supplier Device Package=0603, Supplier Part Number 1=10-ERA-3VEB3300VCT-ND, Temperature Coefficient=±25ppm/°C, Tolerance=±0.1%, componentlink1description=Datasheet, componentlink1url=https://b2b-api.panasonic.eu/file_stream/pids/fileversion/9152, componentlink2description="DigiKey Link", componentlink2url=https://www.digikey.com/en/products/detail/panasonic-electronic-components/ERA-3VEB3300V/12085193, Composition="Thin Film", Features="Anti-Sulfur, Automotive AEC-Q200", Height - Seated (Max)="0.022\" (0.55mm)", lastupdated="2/9/2024 8:41:22 PM", Lifecycle Status=Active, Minimum Order=1, Number of Terminations=2, Package / Case="0603 (1608 Metric)", packaging=TapeAndReel, Part Number=ERA-3VEB3300V, Part Status=Active, partid=62303, price=0.10, Resistance="330 Ohms", series=ERA-3V, Size / Dimension="0.063\" L x 0.031\" W (1.60mm x 0.80mm)", Supplier 1=DigiKey
R4: library part PLT1206Z5000AST5, "RES SMD 500 OHM 0.05% 0.4W 1206", Device Package="1206 (3216 Metric)", manufacturer="Vishay Thin Film", Operating Temperature="-55°C ~ 125°C", Power (Watts)="0.4W, 2/5W", Supplier Device Package=1206, Supplier Part Number 1=PLT1206-500ACT-ND, Temperature Coefficient=±5ppm/°C, Tolerance=±0.05%, componentlink1description=Datasheet, componentlink1url=http://www.vishay.com/docs/60030/plt.pdf, componentlink2description="DigiKey Link", componentlink2url=http://digikey.com/product-detail/en/vishay-thin-film/PLT1206Z5000AST5/PLT1206-500ACT-ND/2120427, Composition="Thin Film", Features="Anti-Corrosive, Flame Proof, Moisture Resistant, Safety", Height - Seated (Max)="0.033\" (0.84mm)", lastupdated="2024-02-09 8:54:28 PM", Lifecycle Status=Active, Minimum Order=1, Number of Terminations=2, Package / Case="1206 (3216 Metric)", packaging=TapeAndReel, Part Number=PLT1206Z5000AST5, Part Status=Active, partid=30946, price=2.64, Resistance="500 Ohms", series=PLT, Size / Dimension="0.126\" L x 0.063\" W (3.20mm x 1.60mm)", Supplier 1=DigiKey
R5 R6: library part P2TC0603D1002LNTA, "P2TC0603 2PPM/C 10K 0,01% N TA", Device Package="0603 (1608 Metric)", manufacturer="Vishay Sfernice", Operating Temperature="-55°C ~ 155°C", Power (Watts)="0.125W, 1/8W", Supplier Device Package=0603, Supplier Part Number 1=716-P2TC0603D1002LNTACT-ND, Temperature Coefficient=±2ppm/°C, Tolerance=±0.01%, componentlink1description=Datasheet, componentlink1url=https://www.vishay.com/docs/53080/p2tc.pdf, componentlink2description="DigiKey Link", componentlink2url=https://www.digikey.com/en/products/detail/vishay-sfernice/P2TC0603D1002LNTA/11657673, Composition="Thin Film", Features="Anti-Sulfur, Moisture Resistant", Height - Seated (Max)="0.025\" (0.63mm)", lastupdated="2/9/2024 8:41:20 PM", Lifecycle Status=Active, Minimum Order=1, Number of Terminations=2, Package / Case="0603 (1608 Metric)", packaging=TapeAndReel, Part Number=P2TC0603D1002LNTA, Part Status=Active, partid=62108, price=11.51, Resistance="10 kOhms", series=P2TC, Size / Dimension="0.060\" L x 0.033\" W (1.52mm x 0.85mm)", Supplier 1=DigiKey
R7 R11: library part APC0603B10K0N, "1/16 WATTS PRECISION CHIP 10 KIL", Device Package="0603 (1608 Metric)", manufacturer=Ohmite, Operating Temperature="-55°C ~ 155°C", Power (Watts)="0.063W, 1/16W", Supplier Device Package=0603, Supplier Part Number 1=273-APC0603B10K0NCT-ND, Temperature Coefficient=±25ppm/°C, Tolerance=±0.1%, componentlink1description=Datasheet, componentlink1url=https://www.ohmite.com/assets/docs/APC-1-15.34.pdf, componentlink2description="DigiKey Link", componentlink2url=https://www.digikey.com/en/products/detail/ohmite/APC0603B10K0N/16369646, Composition="Thin Film", Height - Seated (Max)="0.022\" (0.55mm)", lastupdated="2/9/2024 8:40:41 PM", Lifecycle Status=Active, Minimum Order=1, Number of Terminations=2, Package / Case="0603 (1608 Metric)", packaging=TapeAndReel, Part Number=APC0603B10K0N, Part Status=Active, partid=77923, price=0.05, Resistance="10 kOhms", series=APC, Size / Dimension="0.061\" L x 0.031\" W (1.55mm x 0.80mm)", Supplier 1=DigiKey
R8 R9 R10: library part RCC0603330RFKEA, "RCC0603 100 330R 1% ET1 E3", Device Package="0603 (1608 Metric)", manufacturer="Vishay Dale", Operating Temperature="-55°C ~ 155°C", Power (Watts)="0.2W, 1/5W", Ratings=AEC-Q200, Supplier Device Package=0603, Supplier Part Number 1=541-RCC0603330RFKEACT-ND, Temperature Coefficient=±100ppm/°C, Tolerance=±1%, componentlink1description=Datasheet, componentlink1url=https://www.vishay.com/docs/20066/rcce3.pdf, componentlink2description="DigiKey Link", componentlink2url=https://www.digikey.com/en/products/detail/vishay-dale/RCC0603330RFKEA/12084212, Composition="Thick Film", Features="Automotive AEC-Q200", Height - Seated (Max)="0.020\" (0.50mm)", lastupdated="2/9/2024 8:41:26 PM", Lifecycle Status=Active, Minimum Order=1, Number of Terminations=2, Package / Case="0603 (1608 Metric)", packaging=TapeAndReel, Part Number=RCC0603330RFKEA, Part Status=Active, partid=62920, price=0.01, Resistance="330 Ohms", series="RCC e3", Size / Dimension="0.061\" L x 0.033\" W (1.55mm x 0.85mm)", Supplier 1=DigiKey
R12: library part CPF0603F750RC1, "RES SMD 750 OHM 1% 1/16W 0603", Device Package="0603 (1608 Metric)", manufacturer="TE Connectivity Passive Product", Operating Temperature="-55°C ~ 155°C", Power (Watts)="0.063W, 1/16W", Supplier Device Package=0603, Supplier Part Number 1=A102316CT-ND, Temperature Coefficient=±50ppm/°C, Tolerance=±1%, componentlink1description=Datasheet, componentlink1url=https://www.te.com/commerce/DocumentDelivery/DDEController?Action=srchrtrv&DocNm=1773200&DocType=DS&DocLang=English, componentlink2description="DigiKey Link", componentlink2url=https://www.digikey.com/en/products/detail/te-connectivity-passive-product/CPF0603F750RC1/2384377, Composition="Thin Film", Height - Seated (Max)="0.022\" (0.55mm)", lastupdated="2024-02-09 8:43:28 PM", Lifecycle Status=Active, Minimum Order=1, Number of Terminations=2, Package / Case="0603 (1608 Metric)", packaging=TapeAndReel, Part Number=CPF0603F750RC1, Part Status=Active, partid=7040, price=0.02, Resistance="750 Ohms", series="CPF, Neohm", Size / Dimension="0.061\" L x 0.031\" W (1.55mm x 0.80mm)", Supplier 1=DigiKey
Rbot: library part RT0603FRE0733KL, "RES SMD 33K OHM 1% 1/10W 0603", Device Package="0603 (1608 Metric)", manufacturer=Yageo, Operating Temperature="-55°C ~ 155°C", Power (Watts)="0.1W, 1/10W", Supplier Device Package=0603, Supplier Part Number 1=YAG5959CT-ND, Temperature Coefficient=±50ppm/°C, Tolerance=±1%, componentlink1description=Datasheet, componentlink1url=https://www.yageo.com/upload/media/product/productsearch/datasheet/rchip/PYu-RT_1-to-0.01_RoHS_L_11.pdf, componentlink2description="DigiKey Link", componentlink2url=https://www.digikey.com/en/products/detail/yageo/RT0603FRE0733KL/1075313, Composition="Thin Film", Height - Seated (Max)="0.022\" (0.55mm)", lastupdated="2024-07-25 9:19:32 AM", Lifecycle Status=Active, Minimum Order=1, Number of Terminations=2, Package / Case="0603 (1608 Metric)", packaging=TapeAndReel, Part Number=RT0603FRE0733KL, Part Status=Active, partid=5680, price=0.01, Resistance="33 kOhms", series=RT, Size / Dimension="0.063\" L x 0.031\" W (1.60mm x 0.80mm)", Supplier 1=DigiKey
Rfbb1: library part CMP-250906-231724-1, "RES Thin Film,  24.9kΩ, 1%, 0.1W, 50ppm/°C, 0603"
Rfbt1 Rreset1 Rreset2: library part RNCS0603BKE100K, "RES 100K OHM 0.1% 1/16W 0603", Device Package="0603 (1608 Metric)", manufacturer="Stackpole Electronics Inc", Operating Temperature="-55°C ~ 155°C", Power (Watts)="0.063W, 1/16W", Ratings=AEC-Q200, Supplier Device Package=0603, Supplier Part Number 1=RNCS0603BKE100KCT-ND, Temperature Coefficient=±25ppm/°C, Tolerance=±0.1%, componentlink1description=Datasheet, componentlink1url=https://www.seielect.com/catalog/sei-rncs_rnch.pdf, componentlink2description="DigiKey Link", componentlink2url=https://www.digikey.com/en/products/detail/stackpole-electronics-inc/RNCS0603BKE100K/1708835, Composition="Thin Film", Features="Anti-Corrosive, Automotive AEC-Q200, Moisture Resistant", Height - Seated (Max)="0.022\" (0.55mm)", lastupdated="2024-02-09 8:43:37 PM", Lifecycle Status=Active, Minimum Order=1, Number of Terminations=2, Package / Case="0603 (1608 Metric)", packaging=TapeAndReel, Part Number=RNCS0603BKE100K, Part Status=Active, partid=4849, price=0.06, Resistance="100 kOhms", series=RNCS, Size / Dimension="0.061\" L x 0.031\" W (1.55mm x 0.80mm)", Supplier 1=DigiKey
Rtop: library part RC0603FR-07300KL, "RES 300K OHM 1% 1/10W 0603", Device Package="0603 (1608 Metric)", manufacturer=Yageo, Operating Temperature="-55°C ~ 155°C", Power (Watts)="0.1W, 1/10W", Supplier Device Package=0603, Supplier Part Number 1=311-300KHRCT-ND, Temperature Coefficient=±100ppm/°C, Tolerance=±1%, componentlink1description=Datasheet, componentlink1url=https://www.yageo.com/upload/media/product/productsearch/datasheet/rchip/PYu-RC_Group_51_RoHS_L_10.pdf, componentlink2description="DigiKey Link", componentlink2url=https://www.digikey.com/en/products/detail/yageo/RC0603FR-07300KL/727145, Composition="Thick Film", Features="Moisture Resistant", Height - Seated (Max)="0.022\" (0.55mm)", lastupdated="2024-07-25 9:19:32 AM", Lifecycle Status=Active, Minimum Order=1, Number of Terminations=2, Package / Case="0603 (1608 Metric)", packaging=CutTape, Part Number=RC0603FR-07300KL, Part Status=Active, partid=7517, price=0.01, Resistance="300 kOhms", series=RC_L, Size / Dimension="0.063\" L x 0.031\" W (1.60mm x 0.80mm)", Supplier 1=DigiKey
"SWD Header1": library part CMP-04776-000816-1, "2.54MM KK HDR VT FRICLK VRA .5AU", Color=Natural, Contact Resistance=10mR, Current Rating=4A, Flammability Rating="UL94 V-0", Housing Color=White, Insulation Resistance=50GR, Max Current Rating=7A, Max Operating Temperature=75°C, Max Voltage Rating (AC)=250V, Min Operating Temperature=0°C, Package Quantity=10, Connector Type="Male Pin", Contact Gender=Male, Contact Material=Brass, Contact Mating Length=0.295inch, Contact Plating=Gold, Contact Type="Male Pin", Depth=5.8mm, Fastening Type=Friction, Gender=Male, Glow Wire Compliant=Non-compliant, Halogen Free="Low Halogen", Height=14.73mm, Housing Material=Nylon, Lead Free="Lead Free", Length=12.7mm, Mount="Through Hole", Number of Circuits=5, Number of Contacts=5, Number of Lines=1, Number of Poles=5, Number of Positions=5, Number of Rows=1, Orientation=Straight, packaging=Bulk, Pitch=2.54mm, Radiation Hardening=No, series="KK® 6410", Termination=Solder, Voltage Rating=250V, Voltage Rating (DC)=250V
U1: library part CMP-209535-000001-1, "LDO Voltage Regulators 1A, 3.3V", Dropout Voltage=1.1V, manufacturer="Advanced Monolithic Systems", Max Junction Temp=+125°C, Max Power Dissipation=1.2W, Max Supply Voltage=15V, Nominal Supply Current=5mA, Output Current=1A, Output Voltage=3.3V, Package=AMS1117, Temperature="-40°C to +125°C", Temperature Range Low=-40°C, Automotive=No, Category=IC, componentlink2description=Datasheet, componentlink2url=http://www.advanced-monolithic.com/pdf/ds1117.pdf, Device Class L1="Integrated Circuits (ICs)", Device Class L2="Power Management ICs", Device Class L3="Voltage Regulators - Linear", Height=1.8mm, Ipc Land Pattern Name=SOT229P700X180-4, Lead Free=Yes, Manufacturer Part Number=AMS1117-3.3, Number of Outputs=1, Octopart=https://octopart.com/ams1117-3.3-advanced+monolithic+systems-25899300, Output Type=Fixed, RoHS=TRUE, Standoff Height=0.64mm, Temperature Range High=+125°C
U2: "Automotive 8A buck converter optimized for power density and low EMI 16-VQFN-HR -40 to 150", Manufacturer_Name="Texas Instruments", Supplier Part Number 1=296-LM61480Q5RPHRQ1CT-ND, Copyright="Copyright (C) 2025 Ultra Librarian. All rights reserved.", Manufacturer_Part_Number=LM61480Q5RPHRQ1, RefDes=RefDes, Supplier 1=DigiKey, Type=TYPE
U3: library part CMP-0243-00216-1, "ARM Cortex-M4 32-bit MCU+FPU, 256 KB Flash, 128 KB Internal RAM, 50 I/Os, 64-Pin LQFP, -40 to 85 degC, Tray", I/Os (High Current)=50, Operating Frequency(F) (Processor speed) (MHz)=180, Package Description=LQFP64, Package Reference="64-Pin Low-profile Quad Flat Package, Body 10 x 10 mm, Pitch 0.5 mm", Supply Voltage(Vcc) min (V)=1.7, componentlink1description="Manufacturer URL", componentlink1url=http://www.st.com/, componentlink2description=Datasheet, componentlink2url=http://www.st.com/st-web-ui/static/active/en/resource/technical/document/datasheet/DM00141306.pdf, Core="ARM Cortex-M4", D/A Converter=2, DatasheetVersion="Rev. 6", FLASH Size (Prog) (kB)=256, Internal RAM Size (kB)=128, Mounting Technology="Surface Mount", Packing=Tray
U4: library part CMP-0339-00018-2, "Dual In / Single Out Autoswitching Power Mux, 2.8 to 5.5 V, -40 to 85 degC, 8-pin TSSOP (PW), Green (RoHS & no Sb/Br)", IN1 Output Current(Max)(A)=1.25, IN1, IN2 Input Voltage(Max)(V)=5.5, IN1, IN2 Input Voltage(Min)(V)=2.8, manufacturer="Texas Instruments", Code_JEDEC=MO-153, componentlink1description=Datasheet, componentlink1url=http://www.ti.com/general/docs/lit/getliterature.tsp?genericPartNumber=TPS2115A&fileType=pdf, DatasheetVersion=SBVS044F, Eco-Plan="Green (RoHS & no Sb/Br)", IN1 rDS(on)(Typ)(mOhm)=84, IN2 Output Current(Max)(A)=1.25, IN2 rDS(on)(Typ)(Ohms)=0.084, Mounting Technology="Surface Mount", Number of Inputs=2, PackageDescription="8-Pin Plastic Thin Small Outline Package 3 x 4.4 mm Body ,0.65 mm Pitch", PackageReference=PW0008A, PackageVersion="revG, Feb-2011", PartNumber=TPS2115APWR, SubFamily="Power Multiplexer (MUX)"
Y1: library part 9C-8.000MBBK-T, "CRYSTAL 8.0000MHZ 20PF SMD", ESR (Equivalent Series Resistance)="80 Ohms", Frequency Stability=±50ppm, Load Capacitance=20pF, manufacturer="TXC CORPORATION", Operating Mode=Fundamental, Operating Temperature="-20°C ~ 70°C", Package / Case=HC-49S, Supplier Part Number 1=887-2475-1-ND, componentlink1description=Datasheet, componentlink1url=http://www.txccorp.com/download/products/quartz_crystals/2015TXC_9C_32.pdf, componentlink2description="DigiKey Link", componentlink2url=http://digikey.com/product-detail/en/txc-corporation/9C-8.000MBBK-T/887-2475-1-ND/4475454, Frequency=8MHz, Frequency Tolerance=±50ppm, Height - Seated (Max)="0.161\" (4.10mm)", lastupdated="6/3/2024 8:02:24 PM", Lifecycle Status=Active, Minimum Order=1, Mounting Type="Surface Mount", packaging=TapeAndReel, Part Number=9C-8.000MBBK-T, Part Status=Active, partid=697, price=0.18, series=9C, Size / Dimension="0.449\" L x 0.189\" W (11.40mm x 4.80mm)", Supplier 1=DigiKey, Type="MHz Crystal"

## Via types
v1: diameter 0.6, hole 0.3, Top Layer to Bottom Layer, tented both sides, 140 vias
v2: diameter 0.6, hole 0.3, Top Layer to Bottom Layer, tented top, 1 vias

## Nets (pads, with @x,y where several pads share a name; then routed paths per layer and width w, separated by ;. In a path a pad name is that pad's centre, name@x,y a point inside that pad or via, vN(x,y) a via of type N, cw(c..) or ccw(c..) an arc to the next point about the centre after c; other vN are vias at no path point)
3V3: "SWD Header1.1" C3.2 C4.2 C6.1 C7.1 C8.1 C9.1 C10.1 C11.1 C12.1 C13.1 D1.1 R5.1 U1.2 U1.4 U3.1 U3.13 U3.19 U3.32 U3.48 U3.64 | length 13.3
  Top Layer w0.2: v1(14.983,30.479) 15.862,30.479 U1.4 ; U1.2 22.607,30.53 23.458,30.53 v1(23.51,30.479) ; v1(24.326,16.835) 24.374,16.787 v1(24.374,15.217) 25.491,15.217 25.539,15.169 U3.13 ; v1(24.622,21.519) 24.643,21.519 24.993,21.169 U3.1 ; C10.1 27.278,23.719 27.778,23.219 U3.64 ; U3.19 29.266,10.34 29.617,9.989 29.975,9.989 v1(30.111,9.853) ; U3.32 35.766,11.615 35.812,11.569 v1(36.787,11.569) ; v1(36.918,9.585) C8.1@36.918,9.612 ; U3.48 37.816,22.135 37.943,22.262 37.943,22.283 38.079,22.419 v1(38.101,22.419)
  other v1: 22.333,2.517 31.654,4.074 22.282,4.549 25.349,8.967 27.378,23.619
5V_BUCK: Cbias1.1 Cout1.1 D2.1 J4.1 L1.2 Rfbt1.1 Rreset1.2 Rreset2.1 U2.5 U4.8 | length 8.1
  Top Layer w0.2: U2.5 v1(29.926,45.569) ; Rfbt1.1 v1(33.616,44.969) ; U4.8 v1(32.704,32.652) ; Cout1.1 33.331,35.426 v1(34.266,35.426) ; Rreset2.1 v1(34.26,38.01) v1@34.266,38.004 ; v1(35.677,52.006) D2.1 ; v1(35.989,38.159) Rreset1.2 ; v1(37.754,38.032) Cbias1.1
  other v1: 27.686,34.846 28.476,34.846 26.879,35.769 27.811,35.786 35.01,47.438 33.51,47.506 34.2,47.498 35.677,47.506 33.51,48.562 34.266,48.562 35.01,48.562 35.677,48.562
5V_SYS: C1.2 C2.2 J2.5 J5.5 J8.1 U1.3 U4.7 | length 5